# EAGLE board PCB (EAGLE 6.3)
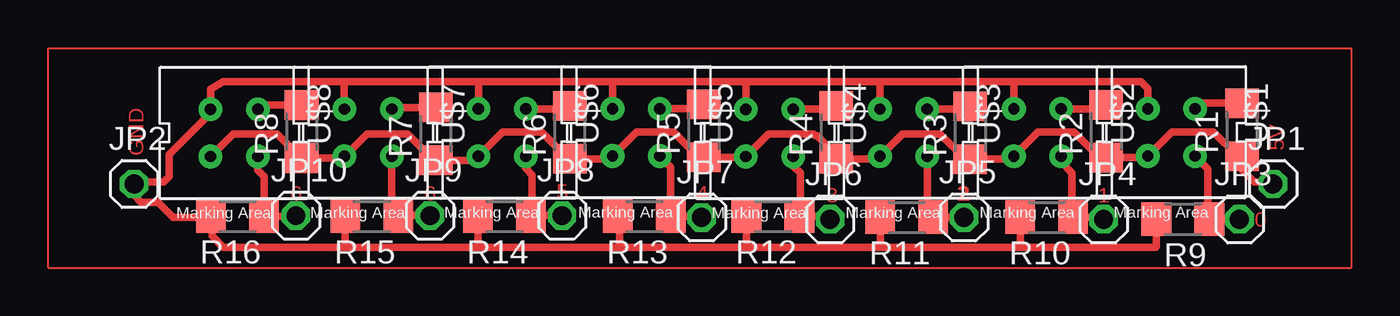
[diagram p0: board, top side]

No outline drawn. Coordinates in mm, seen from the top.
Copper layers (1*16): Top 0.035mm / dielectric 1.5mm / Bottom 0.035mm
Design rules "default": minimum track width 10mil, minimum drill 24mil, track to track 8mil, track to pad 8mil, pad to pad 8mil, via to via 8mil, smd to smd 8mil, copper to edge 40mil, drill to drill 8mil, minimum pad ring 10mil, minimum via ring 8mil, stop-mask expansion 4mil, vias tented up to drill 0mil, thermal gap 10mil

## Footprints (pad centres in the part's own frame; a part is rotated, then mirrored left to right if it is on the bottom)
1X01 = drill 1.016 octagon: 1 0,0
R1206 = smd 1.6 x 1.803: 1 -1.422,0; 2 1.422,0
4 = drill 0.61 pad 1.27: A -1.27,1.27; C 1.27,-1.27; E 1.27,1.27; K -1.27,-1.27

## Placement (x,y rotation side)
JP1  5V  [1X01]  68.1,3.8 0 top
JP2  GND  [1X01]  6.9,3.8 0 top
JP3  D0  [1X01]  66.3,1.9 0 top
JP4  D1  [1X01]  59,1.9 0 top
JP5  D2  [1X01]  51.5,2 0 top
JP6  D3  [1X01]  44.3,1.9 0 top
JP7  D4  [1X01]  37.4,2 0 top
JP8  D5  [1X01]  29.9,2.1 0 top
JP9  D6  [1X01]  22.8,2.1 0 top
JP10  [1X01]  15.6,2.1 0 top
R1  220  [R1206]  66.43,6.72 90 top
R2  220  [R1206]  59.13,6.64 90 top
R3  220  [R1206]  51.83,6.56 90 top
R4  220  [R1206]  44.63,6.58 90 top
R5  220  [R1206]  37.51,6.66 90 top
R6  220  [R1206]  30.31,6.58 90 top
R7  220  [R1206]  23.11,6.5 90 top
R8  220  [R1206]  15.91,6.62 90 top
R9  20k  [R1206]  63.26,1.91 180 top
R10  20k  [R1206]  55.94,2.01 180 top
R11  20k  [R1206]  48.42,2.01 180 top
R12  20k  [R1206]  41.24,2.06 180 top
R13  20k  [R1206]  34.32,2.06 180 top
R14  20k  [R1206]  26.8,2.06 180 top
R15  20k  [R1206]  19.68,2.06 180 top
R16  20k  [R1206]  12.46,2.06 180 top
U$1  CNY70  [4]  62.65,6.58 270 top
U$2  CNY70  [4]  55.45,6.57 270 top
U$3  CNY70  [4]  48.25,6.56 270 top
U$4  CNY70  [4]  41.05,6.55 270 top
U$5  CNY70  [4]  33.88,6.58 270 top
U$6  CNY70  [4]  26.68,6.57 270 top
U$7  CNY70  [4]  19.48,6.56 270 top
U$8  CNY70  [4]  12.28,6.55 270 top

## Library data of the parts
JP1-JP10 = pinhead
R1-R16 = rcl
U$1-U$8 = cny70

## Nets
N$1: R1.2 U$1.A
N$2: R2.2 U$2.A
N$3: R3.2 U$3.A
N$4: R4.2 U$4.A
N$5: R5.2 U$5.A
N$6: R6.2 U$6.A
N$7: R7.2 U$7.A
N$8: R8.2 U$8.A
N$9: JP10.1 R16.1 U$8.E
N$10: JP9.1 R15.1 U$7.E
N$11: JP8.1 R14.1 U$6.E
N$12: JP7.1 R13.1 U$5.E
N$13: JP6.1 R12.1 U$4.E
N$14: JP5.1 R11.1 U$3.E
N$15: JP4.1 R10.1 U$2.E
N$16: JP3.1 R9.1 U$1.E
N$18: JP1.1 R1.1 R2.1 R3.1 R4.1 R5.1 R6.1 R7.1 R8.1 U$1.C U$2.C U$3.C U$4.C U$5.C U$6.C U$7.C U$8.C
N$20: JP2.1 R9.2 R10.2 R11.2 R12.2 R13.2 R14.2 R15.2 R16.2 U$1.K U$2.K U$3.K U$4.K U$5.K U$6.K U$7.K U$8.K

## Tracks (layer width: path | path; a pad name or v marks a point on that pad's centre or on a via)
N$1
  Top 0.406: R1.2 64.21,8.14 U$1.A
N$2
  Top 0.406: 58.73,7.84 R2.2 58.91,7.84 U$2.A
N$3
  Top 0.406: U$3.A 51.68,7.83 R3.2
N$4
  Top 0.406: U$4.A 44.45,7.82 R4.2
N$5
  Top 0.406: U$5.A 37.28,7.85 R5.2
N$6
  Top 0.406: U$6.A 30.15,7.84 R6.2
N$7
  Top 0.406: R7.2 20.84,7.92 U$7.A
N$8
  Top 0.406: R8.2 13.77,8.04 U$8.A
N$9
  Top 0.406: U$8.E 13.55,4.55 13.9,4.2 13.9,2.08 R16.1 15.56,2.06 JP10.1
N$10
  Top 0.406: JP9.1 21.14,2.1 R15.1 20.75,2.41 U$7.E
N$11
  Top 0.406: JP8.1 28.26,2.1 R14.1 28.3,2.14 28.3,4.3 27.95,4.65 U$6.E
N$12
  Top 0.406: JP7.1 37.34,2.06 R13.1 35.74,4.72 U$5.E
N$13
  Top 0.406: JP6.1 44.14,2.06 R12.1 42.7,2.1 42.7,4.4 42.32,4.78 U$4.E
N$14
  Top 0.406: JP5.1 R11.1 49.52,2.33 U$3.E
N$15
  Top 0.406: JP4.1 58.89,2.01 R10.1 57.3,2.07 57.3,4.4 56.72,4.98 U$2.E
N$16
  Top 0.406: U$1.E 63.92,5.28 64.6,4.6 64.6,1.99 R9.1 JP3.1
N$17  (via drill 0.6)
  other vias: 6.9,3.8
N$18
  Top 0.406: U$8.C 12.23,6.5 14.6,6.5 R8.1 18.12,5.2 U$7.C 19.42,6.5 21.6,6.5 23,5.1 23.1,5.1 R7.1 25.19,5.08 U$6.C 26.71,6.6 28.8,6.6 30.24,5.16 R6.1 32.46,5.16 U$5.C 33.9,6.6 35.9,6.6 37.26,5.24 R5.1 39.74,5.24 U$4.C 41,6.5 43.4,6.5 43.5,6.4 43.6,6.4 44.63,5.37 R4.1 46.85,5.16 U$3.C 48.19,6.5 50.2,6.5 51.56,5.14 R3.1 54.02,5.14 U$2.C 55.48,6.6 57.4,6.6 58.78,5.22 R2.1 61.29,5.22 U$1.C 62.67,6.6 64.9,6.6 66.2,5.3 R1.1 66.43,4.57 67.1,3.9 68,3.9 JP1.1 68.13,3.83
N$19  (via drill 0.6)
  other vias: 15.6,2.1
N$20
  Top 0.406: 18.2,9.3 11.7,9.3 11.01,8.91 U$8.K 11.01,7.61 8.8,5.4 8.8,4.2 8.5,3.9 7,3.9 JP2.1 6.9,3.2 7.3,2.8 8.2,2.8 9,2 10.98,2 R16.2 11.1,2 11.1,1 11.7,0.4 18.3,0.4 | 18.2,9.3 U$7.K | U$6.K 25.41,9.29 25.4,9.3 | 25.4,9.3 18.2,9.3 | U$5.K 32.61,9.29 32.7,9.3 | 32.7,9.3 25.4,9.3 | U$4.K 39.78,9.28 39.9,9.3 | 39.9,9.3 32.7,9.3 | U$3.K 46.98,9.28 47,9.3 | 47,9.3 39.9,9.3 | U$2.K 54.18,9.28 54.3,9.3 | 54.3,9.3 47,9.3 | U$1.K 61.38,8.92 61,9.3 54.3,9.3 | R15.2 18.26,0.44 18.3,0.4 | R14.2 25.38,0.42 25.4,0.4 | 25.4,0.4 18.3,0.4 | R13.2 32.94,2.06 33,2 33,0.4 | 33,0.4 25.4,0.4 | R12.2 39.82,0.42 39.8,0.4 | 39.8,0.4 33,0.4 | R11.2 47,0.4 | 47,0.4 39.8,0.4 | R10.2 54.52,0.42 | 54.52,0.42 54.5,0.4 47,0.4 | R9.2 61.84,0.44 61.8,0.4 54.54,0.4 54.52,0.42
N$21  (via drill 0.6)
  other vias: 22.8,2.1
N$22  (via drill 0.6)
  other vias: 29.9,2.1
N$23  (via drill 0.6)
  other vias: 37.4,2
N$24  (via drill 0.6)
  other vias: 44.3,1.9
N$25  (via drill 0.6)
  other vias: 51.5,2
N$26  (via drill 0.6)
  other vias: 59,1.9
N$27  (via drill 0.6)
  other vias: 66.3,1.9
N$28  (via drill 0.6)
  other vias: 68.1,3.8
N$29
  Top 0.1: 2.3,-0.7 72.3,-0.7 72.3,11.1 2.3,11.1 2.3,-0.7

## Text on the board
Top: GND | 5V | 6 | 6 | 5 | 4 | 3 | 2 | 2 | 1 | 0